# EAGLE board UDAWA-SensorWater (EAGLE 9.6.2)
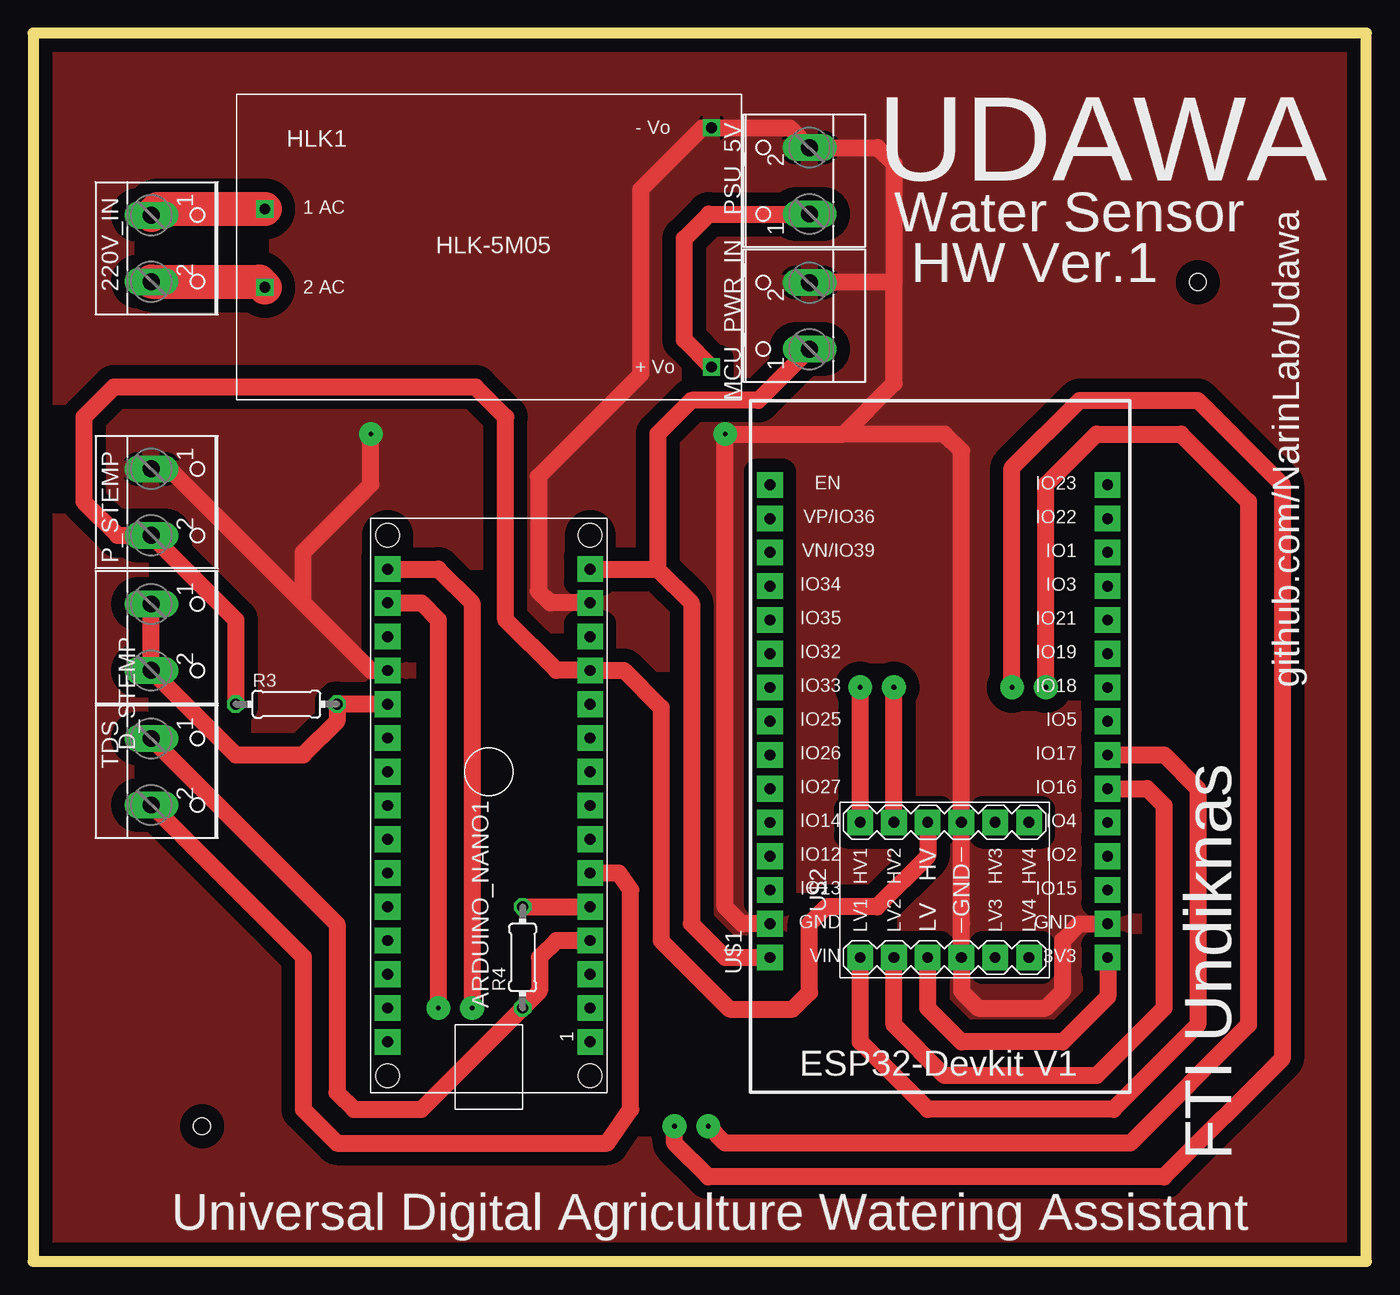
[diagram p0: board, top side]
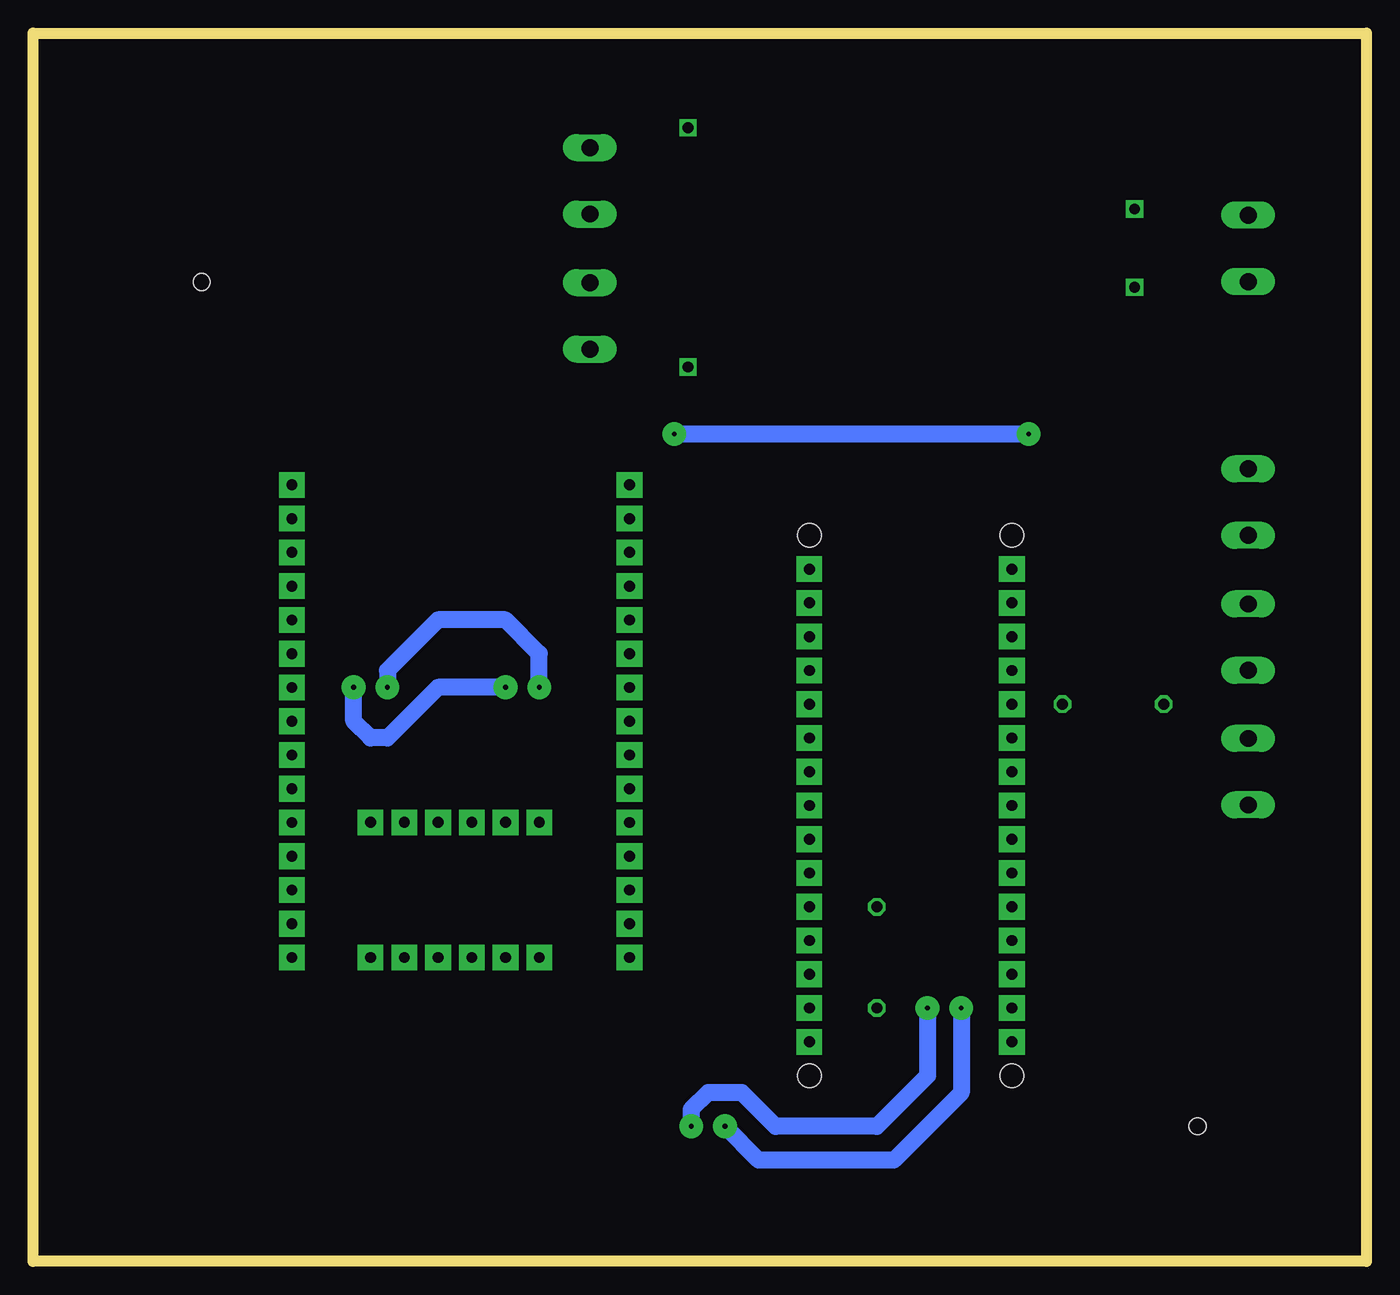
[diagram p1: board, bottom side, seen from below]

Size 100.31 x 92.38 mm. Coordinates in mm from the lower left corner, seen from the top.
Outline: 0,0 100.31,0 100.31,92.38 0,92.38 0,0
Copper layers (1*16): Top 0.035mm / dielectric 1.5mm / Bottom 0.035mm
Design rules "default *": minimum track width 6mil, minimum drill 0.35mm, track to track 40mil, track to pad 40mil, pad to pad 40mil, via to via 40mil, smd to smd 40mil, copper to edge 40mil, drill to drill 6mil, minimum pad ring 10mil, minimum via ring 8mil, stop-mask expansion 4mil, vias tented up to drill 0mil, thermal gap 10mil
Holes 1.27 mm at 12.7,10.16 87.63,73.66

## Footprints (pad centres in the part's own frame; a part is rotated, then mirrored left to right if it is on the bottom)
W237-102 = drill 1.27 pad 2.032 long: 1 -2.5,-1.27; 2 2.5,-1.27
ARDUINO_NANO = drill 0.813 pad 1.93 square: 1 -20.32,-7.62; 2 -17.78,-7.62; 3 -15.24,-7.62; 4 -12.7,-7.62; 5 -10.16,-7.62; 6 -7.62,-7.62; 7 -5.08,-7.62; 8 -2.54,-7.62; 9 0,-7.62; 10 2.54,-7.62; 11 5.08,-7.62; 12 7.62,-7.62; 13 10.16,-7.62; 14 12.7,-7.62; 15 15.24,-7.62; 16 15.24,7.62; 17 12.7,7.62; 18 10.16,7.62; 19 7.62,7.62; 20 5.08,7.62; 21 2.54,7.62; 22 0,7.62; 23 -2.54,7.62; 24 -5.08,7.62; 25 -7.62,7.62; 26 -10.16,7.62; 27 -12.7,7.62; 28 -15.24,7.62; 29 -17.78,7.62; 30 -20.32,7.62 | hole 1.778: -22.86,-7.62; -22.86,7.62; 17.78,7.62; 17.78,-7.62
HLK-5M05 = drill 0.8 square: 1 -16.85,-2.93; 2 -16.85,2.97; 3 16.75,9.07; 4 16.75,-8.93
0204/7 = drill 0.813 octagon: 1 -3.81,0; 2 3.81,0
ESP32-DEVKITV1 = drill 0.813 pad 1.93 square: 3V3 -16.52,-12.27; D1 13.96,-12.27; D2 -8.9,-12.27; D3 11.42,-12.27; D4 -6.36,-12.27; D5 1.26,-12.27; D12 -8.9,13.135; D13 -11.44,13.135; D14 -6.36,13.135; D15 -11.44,-12.27; D16 -3.82,-12.27; D17 -1.28,-12.27; D18 3.8,-12.27; D19 6.34,-12.27; D21 8.88,-12.27; D22 16.5,-12.27; D23 19.04,-12.27; D25 1.26,13.135; D26 -1.28,13.135; D27 -3.82,13.135; D32 6.34,13.135; D33 3.8,13.135; D34 11.42,13.135; D35 8.88,13.135; D36 16.5,13.135; D39 13.96,13.135; EN 19.04,13.135; GND@1 -13.98,13.135; GND@2 -13.98,-12.27; VIN -16.52,13.135
LEVEL-SHIFTER-4CH = drill 0.813 pad 1.93 square: J1.1 -5.08,6.35; J1.2 -5.08,3.81; J1.3 -5.08,1.27; J1.4 -5.08,-1.27; J1.5 -5.08,-3.81; J1.6 -5.08,-6.35; J2.1 5.08,6.35; J2.2 5.08,3.81; J2.3 5.08,1.27; J2.4 5.08,-1.27; J2.5 5.08,-3.81; J2.6 5.08,-6.35

## Placement (x,y rotation side)
220V_IN  [W237-102]  10.16,76.2 270 top
ARDUINO_NANO1  [ARDUINO_NANO]  34.29,36.83 90 top
D_STEMP  [W237-102]  10.16,46.95 270 top
HLK1  5VDC/5W  [HLK-5M05]  34.29,76.2 0 top
MCU_PWR_IN  [W237-102]  57.15,71.12 90 top
P_STEMP  [W237-102]  10.16,57.11 270 top
PSU_5V  [W237-102]  57.15,81.28 90 top
R3  4.7K  [0204/7]  19.05,41.91 0 top
R4  1K  [0204/7]  36.83,22.86 90 top
TDS  [W237-102]  10.16,36.83 270 top
U$1  ESP32DEVKITV1  [ESP32-DEVKITV1]  68.58,39.37 90 top
U$2  LEVEL-SHIFTER-4CH  [LEVEL-SHIFTER-4CH]  68.58,27.94 90 top

## Library data of the parts
220V_IN D_STEMP MCU_PWR_IN P_STEMP PSU_5V TDS = con-wago-500; MPN: 237-102; OC_FARNELL: unknown; OC_NEWARK: 70K9898
ARDUINO_NANO1 = ArduinoNanoV30
HLK1 = HLK-5M05; SIZE: 23x38(mm)
R3 R4 = rcl; SPICEPREFIX: R
U$1 = ESP32-DEVKITV1
U$2 = diy-modules

## Nets
3V3: U$1.3V3 U$2.J1.3
5V: HLK1.4 PSU_5V.1
5V_NANO: ARDUINO_NANO1.12 P_STEMP.2 R3.1 U$2.J2.3
A0: ARDUINO_NANO1.4 R4.1 TDS.1
A1: ARDUINO_NANO1.5 R4.2
A2: ARDUINO_NANO1.6 TDS.2
AC1: 220V_IN.2 HLK1.1
AC2: 220V_IN.1 HLK1.2
D2: ARDUINO_NANO1.20 D_STEMP.1 D_STEMP.2 R3.2
GND: ARDUINO_NANO1.14 ARDUINO_NANO1.19 HLK1.3 MCU_PWR_IN.2 P_STEMP.1 PSU_5V.2 U$1.GND@1 U$1.GND@2 U$2.J1.4 U$2.J2.4
HV1: ARDUINO_NANO1.17 U$2.J2.1
HV2: ARDUINO_NANO1.16 U$2.J2.2
LV1: U$1.D17 U$2.J1.1
LV2: U$1.D16 U$2.J1.2
VIN: ARDUINO_NANO1.15 MCU_PWR_IN.1 U$1.VIN

## Tracks (layer width: path | path; a pad name or v marks a point on that pad's centre or on a via)
3V3
  Top 1.27: U$1.3V3 80.85,19.89 77.47,16.51 69.85,16.51 67.31,19.05 U$2.J1.3
5V
  Top 1.27: PSU_5V.1 50.84,78.78 48.99,76.93 48.99,69.32 HLK1.4
5V_NANO
  Top 1.27: R3.1 15.24,48.26 P_STEMP.2 6.35,54.61 3.81,57.15 3.81,63.5 6.07,65.76 33.3,65.76 35.56,63.5 35.56,48.26 39.37,44.45 ARDUINO_NANO1.12 44.45,44.45 47.24,41.66 47.24,24.13 52.41,18.96 57.15,18.96 58.42,20.23 58.42,25.4 59.69,26.67 63.5,26.67 67.31,30.48 U$2.J2.3
A0
  Top 1.27: ARDUINO_NANO1.4 39.37,24.13 38.1,22.86 38.1,20.32 R4.1 29.21,11.43 24.13,11.43 22.86,12.7 22.86,25.36 TDS.1
A1
  Top 1.27: R4.2 ARDUINO_NANO1.5
A2
  Top 1.27: TDS.2 20.32,22.9 20.32,11.43 22.86,8.89 43.18,8.89 44.96,11.43 44.96,27.94 44.07,29.21 ARDUINO_NANO1.6
AC1
  Top 2.54: 220V_IN.2 17.01,73.7 HLK1.1
AC2
  Top 2.54: 220V_IN.1 9.36,79.17 HLK1.2
D2
  Top 1.27: D_STEMP.1 D_STEMP.2 15.24,38.1 20.32,38.1 22.86,40.64 R3.2 ARDUINO_NANO1.20
GND  (via drill 0.35 pad 1.78)
  Top 1.27: P_STEMP.1 10.24,59.61 20.32,49.53 | ARDUINO_NANO1.19 25.4,44.45 20.32,49.53 | 20.32,49.53 20.32,53.34 25.4,58.42 v25.4,62.23 | 69.85,25.4 U$2.J1.4 69.85,20.32 71.12,19.05 76.2,19.05 77.47,20.32 77.47,24.13 78.73,25.39 U$1.GND@2 | 69.85,25.4 U$2.J2.4 69.85,60.96 68.58,62.23 60.96,62.23 | 69.85,25.4 69.84,25.39 | U$1.GND@1 53.35,25.39 52.07,26.67 v52.07,62.23 | 52.07,62.27 v52.07,62.23 | ARDUINO_NANO1.14 38.91,49.53 38.02,50.42 38.02,59.04 45.72,66.73 45.72,80.63 50.36,85.27 HLK1.3 56.93,85.27 PSU_5V.2 63.54,83.78 64.77,82.55 64.77,73.66 | v52.07,62.23 60.96,62.23 | 60.96,62.23 64.77,66.04 64.77,73.66 | 64.77,73.66 58.46,73.66 MCU_PWR_IN.2
  Bottom 1.27: v25.4,62.23 v52.07,62.23
  pour Top: 0,1.27 99.06,1.27 99.06,92.71 0,92.71 0,90.17
HV1  (via drill 0.35 pad 1.78)
  Top 1.27: ARDUINO_NANO1.17 29.21,49.53 30.48,48.26 v30.48,19.05 | U$2.J2.1 v62.23,43.18 | v73.66,43.18 73.66,59.69 78.74,64.77 87.63,64.77 93.98,58.42 93.98,15.24 85.09,6.35 50.8,6.35 48.26,8.89 v48.26,10.16
  Bottom 1.27: v62.23,43.18 62.23,45.72 64.77,48.26 69.85,48.26 73.66,44.45 v73.66,43.18 | v48.26,10.16 45.72,7.62 35.56,7.62 30.48,12.7 v30.48,19.05
HV2  (via drill 0.35 pad 1.78)
  Top 1.27: ARDUINO_NANO1.16 30.48,52.07 33.02,49.53 v33.02,19.05 | U$2.J2.2 v64.77,43.18 | v76.2,43.18 76.2,58.42 80.01,62.23 86.36,62.23 91.44,57.15 91.44,17.78 82.55,8.89 52.07,8.89 v50.8,10.16
  Bottom 1.27: v64.77,43.18 69.85,43.18 73.66,39.37 74.93,39.37 76.2,40.64 v76.2,43.18 | v33.02,19.05 33.02,13.97 36.83,10.16 44.45,10.16 46.99,12.7 49.53,12.7 50.8,11.43 v50.8,10.16
LV1
  Top 1.27: U$1.D17 85.1,38.09 87.63,35.56 87.63,17.78 81.28,11.43 67.31,11.43 62.23,16.51 U$2.J1.1
LV2
  Top 1.27: U$1.D16 83.81,35.55 83.82,35.56 85.09,34.29 85.09,19.05 80.01,13.97 68.58,13.97 64.77,17.78 U$2.J1.2
VIN
  Top 1.27: U$1.VIN 52.08,22.85 49.53,25.4 49.53,49.53 46.99,52.07 | ARDUINO_NANO1.15 46.99,52.07 | MCU_PWR_IN.1 54.57,64.77 49.53,64.77 46.99,62.23 46.99,52.07

## Text on the board
tPlace: UDAWA | Water Sensor | HW Ver.1 | github.com/NarinLab/Udawa | FTI Undiknas | Universal Digital Agriculture Watering Assistant